# Altium PCB PCB_MEGO_Node_V1.3.1.PcbDoc
Units mil, origin at the board's own origin, x right, y up, seen from the top; angles counter-clockwise.
Board outline 1000 x 1900 mil, 2 copper layers (Top Layer, Bottom Layer); 52 components, 42 nets, 193 pads, 90 vias.
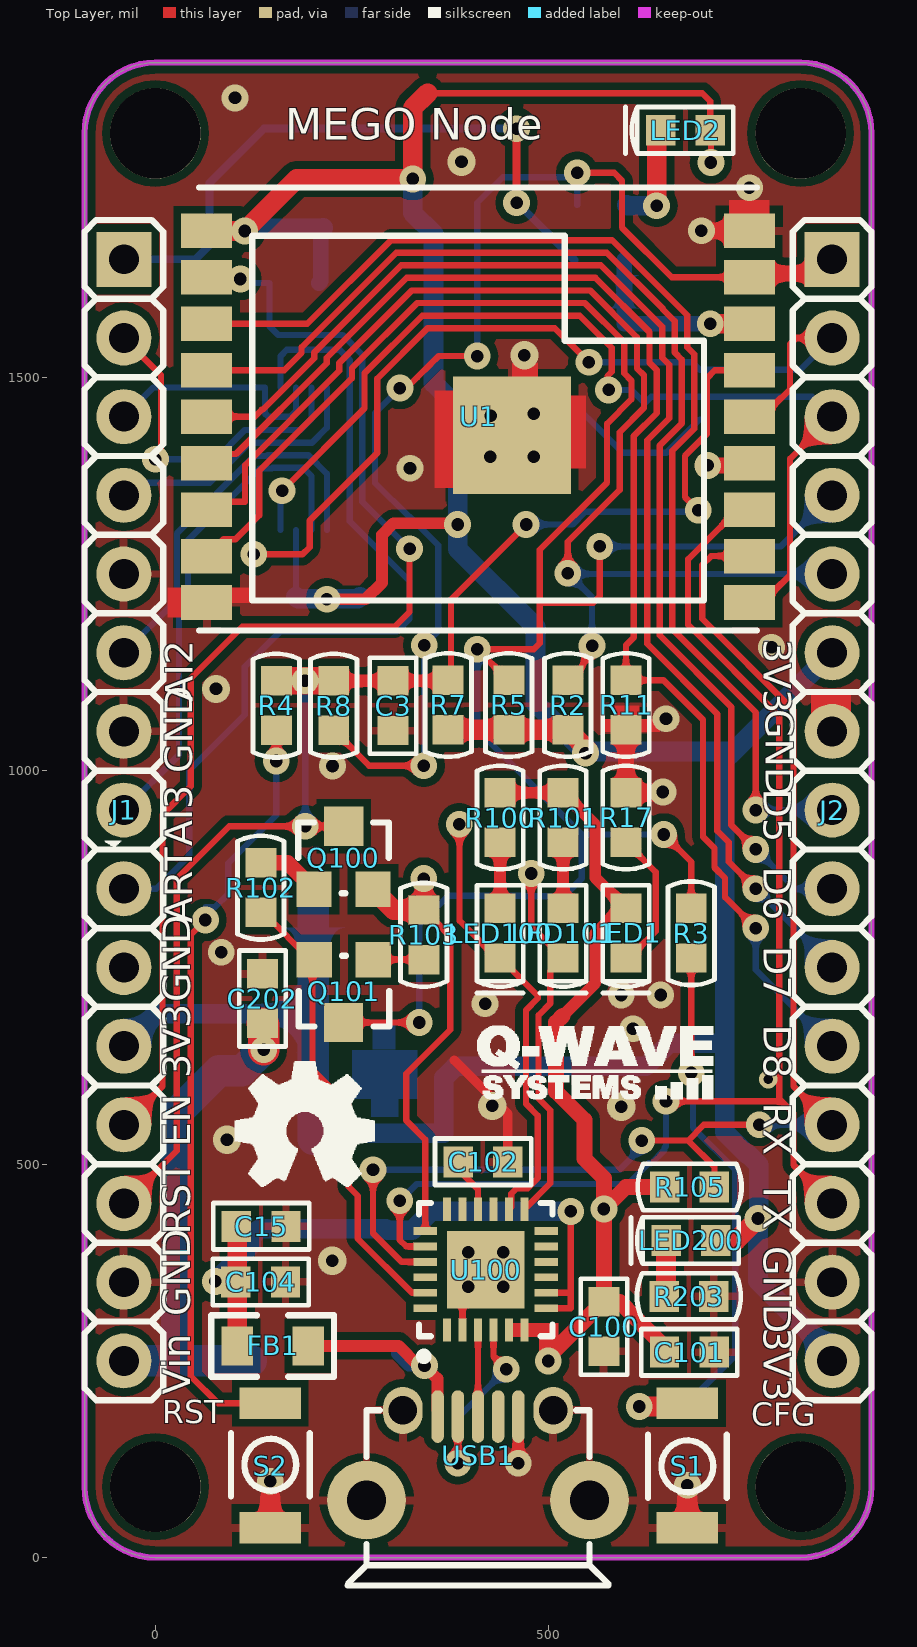
[diagram p0: Top Layer view]
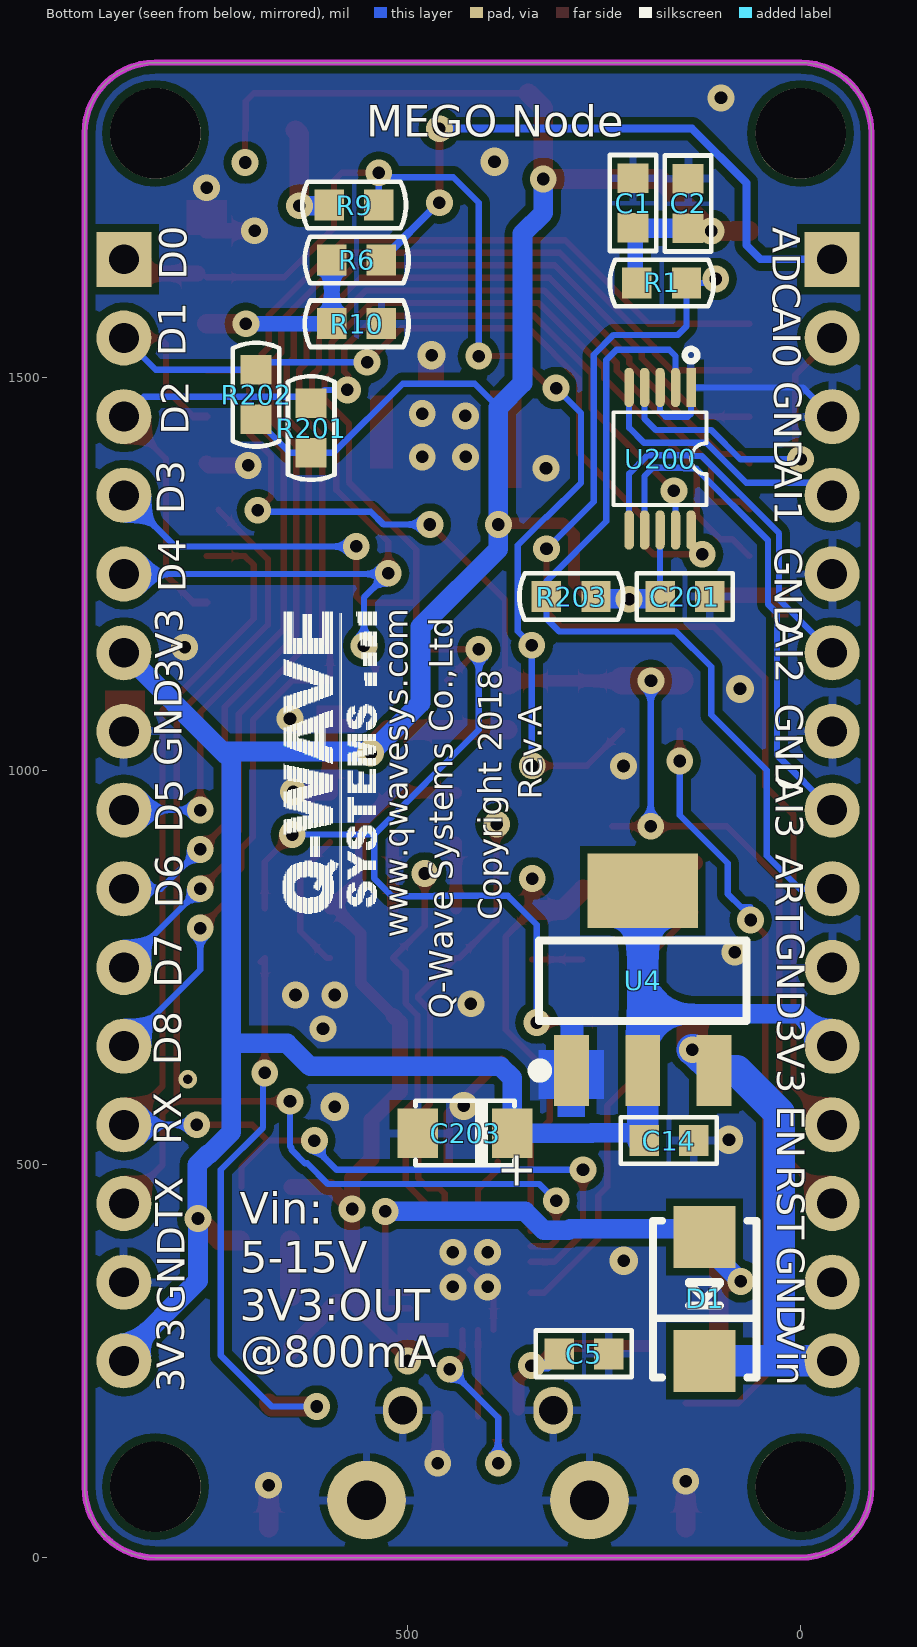
[diagram p1: Bottom Layer view, seen from below]

## Layer stack, top to bottom
Top Solder: solder mask 0.4, Solder Resist, Dk 3.5
Top Layer: signal copper 1.4
Dielectric 1: dielectric 12.6, FR-4, Dk 4.8
Bottom Layer: signal copper 1.4
Bottom Solder: solder mask 0.4, Solder Resist, Dk 3.5

## Board outline
-90,90 ccw(c0,90) 0,0 820,0 ccw(c820,90) 910,90 910,1810 ccw(c820,1810) 820,1900 0,1900 ccw(c0,1810) -90,1810

## Design rules (kind name [scope] priority, off if disabled: settings)
Clearance POLY1 [InPolygon] p1: gap=10 ignorepadtopadclearanceinfootprint=FALSE
Clearance [All] p2: gap=6 ignorepadtopadclearanceinfootprint=FALSE
ComponentClearance [All] p1 off: gap=10 collisioncheckmode=3 verticalgap=10 showdistances=FALSE
Height [All] p1 off: minheight=0 maxheight=1000 prefheight=500
HoleSize [All] p1 off: absolutevalues=TRUE maxlimit=100 minlimit=1 maxpercent=80.000 minpercent=20.000
HoleToHoleClearance [All] p1 off: gap=10 allowstackedmicrovias=TRUE
LayerPairs [All] p1 off: enforce=TRUE
MinimumSolderMaskSliver [All] p1 off: minsoldermaskwidth=10
NetAntennae [All] p1 off: netantennaetolerance=0
PolygonConnect poly [IsVia] p1: connectstyle=Direct reliefconductorwidth=10 reliefentries=4 polygonreliefangle="90 Angle" airgapwidth=10
PolygonConnect [All] p2: connectstyle=Relief reliefconductorwidth=10 reliefentries=4 polygonreliefangle="90 Angle" airgapwidth=10
RoutingVias [All] p1: holewidth=16 width=34 viastyle="Through Hole" minholewidth=16 minwidth=34 maxholewidth=16 maxwidth=34
SilkToSilkClearance [All] p1 off: silktosilkclearance=10
SilkToSolderMaskClearance [IsPad] p1 off: minsilkscreentomaskgap=10 clearancetoexposedcopper=TRUE
SolderMaskExpansion [All] p1: expansion=4
Width [All] p1: maxlimit=100 minlimit=8 preferedwidth=10 minimp=50.000000 maximp=50.000000 favimp=50.000000
21 further rules are at their usual default settings.

## Components (designator, comment, footprint, x,y, rotation, side; value= is the part's Value field where it differs from the comment)
C1 "104" IPC7351_EC_0603 213,1721.5 r270 bottom
C2 "105" IPC7351_EC_0603 143,1721 r270 bottom
C3 "104" IPC7351_EC_0603 302.08,1082.67 r90 top
C5 "103 (10nF)" IPC7351_EC_0603 275.5,259 r0 bottom
C14 "104" IPC7351_EC_0603 167.5,530 r180 bottom
C15 "4.7uF" IPC7351_EC_0603 134.5,421 r0 top
C100 "4.7uF" IPC7351_EC_0603 570,293.5 r270 top
C101 "104" IPC7351_EC_0603 678.5,261 r0 top
C102 "4.7uF" IPC7351_EC_0603 416.5,503 r0 top
C104 "104" IPC7351_EC_0603 133.81,350.39 r0 top
C201 "104" IPC7351_EC_0603 147.13,1221.3 r0 bottom
C202 "104" IPC7351_EC_0603 136,710.5 r270 top
C203 "10uF 6.3V" 3216_18 426.51,539.51 r0 bottom
D1 "SK1B" EDIS_SMA 122,328.74 r180 bottom
FB1 "Ferrite Beads" R0805 149,269 r0 top
J1 "THT_Male_P_1x15" HDR_1X15 -40,1650 r270 top locked
J2 "THT_Male_P_1x15" HDR_1X15 860,1650 r270 top
LED1 "BLUE" IPC7351_ELDS_0603 598.11,793.51 r270 top
LED2 "BLUE" IPC7351_ELDS_0603 673.5,1814 r180 top
LED100 "GREEN" IPC7351_ELDS_0603 438.11,793.51 r270 top
LED101 "RED" IPC7351_ELDS_0603 518.11,793.51 r270 top
LED200 "GREEN" IPC7351_ELDS_0603 680.5,403 r180 top
Q100 "BC847C" SOT-23-3 239.05,889.35 r0 top
Q101 "BC847C" SOT-23-3 239.61,720.02 r180 top
R1 "10K" IPC7351_ER_0603 176.5,1620 r0 bottom
R2 "10K" IPC7351_ER_0603 524.11,1083.5 r270 top
R3 "470R" IPC7351_ER_0603 681,793.5 r270 top
R4 "470R" IPC7351_ER_0603 153.68,1082.77 r90 top
R5 "10K" IPC7351_ER_0603 449.11,1083.5 r270 top
R6 "220K" IPC7351_ER_0603 564.22,1649.11 r0 bottom
R7 "10K" IPC7351_ER_0603 372.11,1083.5 r270 top
R8 "0R (NC) *Optional" IPC7351_ER_0603 226.68,1082.77 r90 top
R9 "2K" IPC7351_ER_0603 567.5,1719 r0 bottom
R10 "100K" IPC7351_ER_0603 564.22,1568.11 r0 bottom
R11 "4K7" IPC7351_ER_0603 598.11,1083.51 r270 top
R17 "2K" IPC7351_ER_0603 598.11,940.52 r270 top
R100 "2K" IPC7351_ER_0603 438.11,940.52 r90 top
R101 "2K" IPC7351_ER_0603 518.11,940.52 r90 top
R102 "12K" IPC7351_ER_0603 134,851.5 r270 top
R103 "12K" IPC7351_ER_0603 341.11,791.51 r90 top
R105 "4K7" IPC7351_ER_0603 679,471 r180 top
R201 "10K" IPC7351_ER_0603 622,1435.5 r270 bottom
R202 "10K" IPC7351_ER_0603 692,1478 r270 bottom
R203 "2K" IPC7351_ER_0603 678,332 r180 top
R203 "10K" IPC7351_ER_0603 291.51,1221.3 r180 bottom
S1 "CONFIG" SKRKAEE010 676,117 r270 top
S2 "RESET" SKRKAEE010 146,117 r90 top
U1 "ESP8266_WROOM_02" ESP-WROOM-02D 410,1450 r0 top locked
U4 "LD1117AS33TR" SOT-223-1 200.56,733.19 r180 bottom
U100 "CP2104" QFN24 419.84,365.98 r90 top
U200 "ADS1115" DGS-S-PDSO-G10 178.63,1396.55 r270 bottom
USB1 "microUSB" MICRO-USB-CON 410,130 r0 top locked

## Footprints (in the part's own frame and the unit in brackets; to place one, negate y for a bottom-side part, rotate by r counter-clockwise, add the part's x,y. Pads: shape width x height; smd on the part's side, far side on the other; paste and mask are expansions set on the pad)
3216_18 [mm]
  rect 1.3x1.6 smd: 1(-1.524,0) 2(1.524,0)
  silkscreen extent -1.6,-1.04 1.6,1.07, body extent -1.6,-0.8 1.6,0.8, height 1.68
DGS-S-PDSO-G10 [mm]
  rect 1.27x0.305 smd mask+0.051: 1(-2.3,1)
  oval 1.27x0.305 smd mask+0.051: 2(-2.3,0.5) 3(-2.3,0) 4(-2.3,-0.5) 5(-2.3,-1) 6(2.3,-1) 7(2.3,-0.5) 8(2.3,0) 9(2.3,0.5) 10(2.3,1)
  silkscreen extent -3.55,-1.5 1.5,1.5
EDIS_SMA [mm]
  rect 2x2 smd: 1(0,2) 2(0,-2)
  silkscreen extent -1.67,-2.53 1.67,2.52, body extent -1.4,-1.91 1.27,1.91, height 0.89
ESP-WROOM-02D [mil]
  rect 65x44 smd: 1(-344.92,236.22) 2(-344.92,177.17) 3(-344.92,118.11) 4(-344.92,59.06) 5(-344.92,0) 6(-344.92,-59.06) 7(-344.92,-118.11) 8(-344.92,-177.17) 9(-344.92,-236.22) 10(344.92,-236.22) 11(344.92,-177.17) 12(344.92,-118.11) 13(344.92,-59.06) 14(344.92,0) 15(344.92,59.06) 16(344.92,118.11) 17(344.92,177.17) 18(344.92,236.22)
  rect 149.61x149.61 smd: 19(43.31,-23.62)
  silkscreen extent -354,-272 354,291
HDR_1X15 [mil]
  rect 70x70 hole 38: 1(0,0)
  round 70 hole 38: 2(100,0) 3(200,0) 4(300,0) 5(400,0) 6(500,0) 7(600,0) 8(700,0) 9(800,0) 10(900,0) 11(1000,0) 12(1100,0) 13(1200,0) 14(1300,0) 15(1400,0)
  silkscreen extent -50,-50 1450,50, body extent -50,-49 1450,51, height 321
IPC7351_EC_0603 [mm] "Chip Capacitor; Body 1.6 x 0.8 mm (LxW typ) -- EIA 0603, Metric 1608"
  rect 0.95x1 smd: 1(-0.8,0) 2(0.8,0)
  silkscreen extent -1.55,-0.75 1.55,0.75
IPC7351_ELDS_0603 [mm] "SMT LED 0603"
  rect 0.95x1 smd: 1(-0.8,0) 2(0.8,0)
  silkscreen extent -1.55,-0.75 1.93,0.75
IPC7351_ER_0603 [mm] "Chip Capacitor; Body 1.6 x 0.8 mm (LxW typ) -- EIA 0603, Metric 1608"
  rect 0.95x1 smd: 1(-0.8,0) 2(0.8,0)
  silkscreen extent -1.67,-0.75 1.67,0.75
MICRO-USB-CON [mm]
  round 2.54 hole 1.27: 0(-3.6,-1.45) 0(3.6,-1.45)
  oval 1.27x1.524 hole 0.914: 0(-2.425,1.45) 0(2.425,1.45)
  oval 0.4x1.7 smd: 1(-1.3,1.25) 2(-0.65,1.25) 3(0,1.25) 4(0.65,1.25) 5(1.3,1.25)
  silkscreen extent -4.2,-4.2 4.2,1.45
QFN24 [mm] "QFN, 24-Leads, Body 4.00x4.00mm, Pitch 0.50mm, Thermal Pad 2.75x2.75mm, IPC Medium Density"
  rect 0.75x0.25 smd: 1(-1.95,1.25) 2(-1.95,0.75) 3(-1.95,0.25) 4(-1.95,-0.25) 5(-1.95,-0.75) 6(-1.95,-1.25) 13(1.95,-1.25) 14(1.95,-0.75) 15(1.95,-0.25) 16(1.95,0.25) 17(1.95,0.75) 18(1.95,1.25)
  rect 2.5x2.5 smd: 2(0,0)
  rect 0.25x0.75 smd: 7(-1.25,-1.95) 8(-0.75,-1.95) 9(-0.25,-1.95) 10(0.25,-1.95) 11(0.75,-1.95) 12(1.25,-1.95) 19(1.25,1.95) 20(0.75,1.95) 21(0.25,1.95) 22(-0.25,1.95) 23(-0.75,1.95) 24(-1.25,1.95)
  silkscreen extent -2.92,-2.15 2.15,2.15, body extent -2,-2 2,2, height 0.8
R0805 [mil]
  rect 40x50 smd: 1(-45,0) 2(45,0)
  silkscreen extent -78,-39 78,39, body extent -38,-25 41,24, height 21
SKRKAEE010 [mil]
  rect 40x78 smd: 1(-79,0) 2(79,0)
  silkscreen extent -39,-50 41,50, body extent -102,-59 102,59, height 90
SOT-23-3 [mil]
  rect 45x45 smd: 1(-37.5,-40) 2(37.5,-40)
  rect 50x50 smd: 3(0.5,40)
  silkscreen extent -58,-45 58,45, body extent -55,-50 55,46, height 43
SOT-223-1 [mil]
  rect 44x90 smd: 1(-90.55,-114.17) 2(0,-114.17) 3(90.55,-114.17)
  rect 140x94.49 smd: 4(0,114.17)
  silkscreen extent -139,-122 132,51, body extent -131,-145 133,139, height 73

## Part data
C1 C3 C14 C101 C104 C201 C202: library part "Cap Semi", "0.1µF ±5% 50V Ceramic Capacitor X7R 0603"
C2: library part "Cap Semi", "1µF ±5% 50V Ceramic Capacitor X7R 0603"
C5: library part "Cap Semi", "0.01µF ±5% 50V Ceramic Capacitor X7R 0603"
C15: library part Cap, "4.7µF ±10% 16V Ceramic Capacitor X5R 0805"
C100 C102: library part Cap, "4.7µF ±10% 16V Ceramic Capacitor X5R 0603"
C203: library part "Cap Pol1", "10µF 6.3V Tantalum Chip Capacitors ±20%"
D1: library part Diode, "SK1B SCHOTTKY BARRIER DIODE 100V/1A"
FB1: library part FB, "Ferrite Beads Chip Beads 600O for Signal Line"
J1 J2: "THT Male pin header strip 1x15"
LED1 LED2 LED101: library part LED2, "LED RED 0603"
LED100 LED200: library part LED2, "LED BLUE 0603"
Q100 Q101: library part NPN, "Bipolar (BJT) Transistor NPN 45V 100mA 100MHz 250mW Surface Mount TO-236AB (SOT23)"
R1 R2 R3 R4 R5 R7 R8 R9 R11 R17 R100 R101 R102 R103 R105 R201 R202 R203 R203: library part "Res Semi", "Resistor 0603"
R6 R10: library part "Res Semi", "Resistor 0603 1%"
S1 S2: library part SW-PB, "TACT SWITCH Size 6x6mm,2 Pins, SPST-NO"
U1: library part "ESP8266 WROOM 02", "WiFi Serial Transceiver Module (ESP8266) 4MB"
U4: library part LM1117MPX-3.3, "LD1117AS33TR Positive Fixed Voltage Regulator LDO 3.3V/1A"
U100: "USB Bridge, USB to UART USB 2.0 UART Interface 24QFN"
U200: "ADS1115 Analog to Digital Converters - ADC 16B ADC w/ Int MUX PGA Comp Osc & Ref"

## Free pads (board coordinates)
  round 115 hole 115 unplated paste-300 mask-300: 0(0,90) 0(0,1810) 0(820,90) 0(820,1810)

## Via types
v1: diameter 34, hole 16, Top Layer to Bottom Layer, tented both sides, 82 vias
v2: diameter 36, hole 16, Top Layer to Bottom Layer, tented both sides, 7 vias
v3: diameter 23.62, hole 11.81, Top Layer to Bottom Layer, tented both sides, 1 vias

## Nets (pads, with @x,y where several pads share a name; then routed paths per layer and width w, separated by ;. In a path a pad name is that pad's centre, name@x,y a point inside that pad or via, vN(x,y) a via of type N, cw(c..) or ccw(c..) an arc to the next point about the centre after c; other vN are vias at no path point)
3V3: C1.2 C2.2 C14.1 C201.2 C203.1 J1.11 J2.6 J2.15 LED2.1 LED200.1 R1.2 R2.2 R5.2 R7.2 R201.2 R202.2 R203.2@260.01,1221.3 U1.1 U4.2 U4.4 U200.8 | length 5336.4
  Top Layer w8: 346,1861 695,1861 704.99,1851.01 LED2.1 706,1812.99 v1(706,1773)
  Top Layer w15: v1(218,1218) 267,1218 288,1239 288,1300 302.5,1314.5 382.53,1314.5 v1(384.09,1312.94)
  Top Layer w25: U1.1 65.3,1686 v1(113.47,1686) 179.47,1752 v1(327,1752) 327,1842 346,1861 ; R7.2 R5.2 R2.2 v1@550.11,1026.01 ; LED200.1 737.87,403 v1(765.87,431)
  Bottom Layer w8: C201.2 U200.8 ; 384.09,1461.98 414.11,1492 505.71,1492 593.7,1404.01 R201.2 649.5,1404.01 R202.2
  Bottom Layer w20: R1.2 210,1622.01 C1.2@210,1689.5
  Bottom Layer w25: J1.11 1.36,691.36 164.41,691.36 ; C2.2 210,1689.5 212.5,1689.5 C1.2 ; C201.2 181.43,1218.5 257.21,1218.5 R203.2@260.01,1221.3 ; 198.56,691.36 164.41,691.36 ; C14.1 200.56,531.57 208.79,539.8 265.33,539.8 265.62,539.51 C203.1 366.51,609.51 381.36,624.36 623.36,624.36 652.5,653.5 723.5,653.5 ; 199.56,702.01 200.56,703.01 ; U4.2@200.56,655.21 164.41,691.36 ; 200.56,727.52 164.41,691.36 ; v1(327,1752) 327,1709 353.5,1682.5 353.5,1492.56 384.09,1461.98 v1(384.09,1312.94) 384.09,1281.9 482.99,1183 482.99,1086.03 v1@542.52,1026.5 ; v1(546.56,1022.46) 544.56,1024.46 734.46,1024.46 ; J2.15 860,257.68 765.87,351.82 v1(765.87,431) 767,432.13 767,499 753.5,512.5 751.88,512.5 723.5,540.88 723.5,653.5 ; J2.6 734.46,1024.46 ; 723.5,653.5 723.5,1013.5 734.46,1024.46
  Bottom Layer w40: C14.1@200.56,531.57 U4.2 200.56,655.21 200.56,703.01 200.56,727.52 U4.4@200.56,841.36
ADC: R6.2 R10.2 U1.16 | length 240.3
  Top Layer w10: U1.16@754.81,1568 U1.16
  Top Layer w25: v1(705,1568) U1.16@754.81,1568
  Bottom Layer w20: R6.2 R10.2 595.82,1568 v1(705,1568)
ADC_EX: J1.1 R6.1 | length 811.9
  Top Layer w10: v1(459,1722) v1(459,1816)
  Bottom Layer w10: J1.1 50.93,1650 68.85,1667.92 68.85,1746.85 138,1816 v1(459,1816) ; v1(459,1722) 459.83,1722 R6.1
AIN0: J1.2 U200.4 | length 435.9
  Top Layer w8: J1.2 7,1503 7,1403 v1(0,1396)
  Bottom Layer w8: v1(0,1396) 76.52,1396 113.52,1433 184.26,1433 198.32,1447.06 U200.4
AIN1: J1.4 U200.5 | length 344.7
  Bottom Layer w8: J1.4 -24,1366 69.15,1366 120.15,1417 199,1417 218,1436 U200.5
AIN2: J1.6 U200.6 | length 492.6
  Bottom Layer w8: J1.6 27.4,1217.4 27.4,1301.63 125.77,1400 141.36,1400 142.36,1401 194.63,1401 218,1377.63 U200.6
AIN3: J1.8 U200.7 | length 666.7
  Bottom Layer w8: J1.8@-40,972 J1.8 30,1020 30,1200.2 41.4,1211.6 41.4,1293 132.4,1384 147.99,1384 148.99,1385 188,1385 198.32,1374.69 U200.7
ALERT: J1.9 R203.1@323,1221.3 U200.2 | length 1101.5
  Bottom Layer w8: J1.9 1.01,850 43.01,891.99 43.01,1000.5 113.51,1071 113.51,1132 158.51,1177 307,1177 323,1193 323,1221.3 323,1240.98 247,1316.99 247,1522 234,1535 166.94,1535 158.94,1527 U200.2
CP_GPIO0: LED100.2 U100.14 | length 568.9
  Top Layer w8: v1(386.11,932.01) 386.56,931.56 386.56,809.36 433.91,762.02 LED100.2 486,714.13 486,710.79 471,695.79 471,576.76 486,561.76 486,482.33 473.19,469.52 459.16,469.52 452.13,462.49 452.13,445.52 U100.14
CP_GPIO1: LED101.2 U100.13 | length 476.2
  Top Layer w8: U100.13 502,475.7 502,568.38 487,583.38 487,689.16 502,704.16 502,745.9 LED101.2 477.56,802.57 v1(477.56,869.36)
DGND: C1.1 C2.1 C3.1 C5.1 C14.2 C15.2 C100.2 C101.2 C102.2 C104.2 C201.1 C202.1 C203.2 J1.3 J1.5 J1.7 J1.10 J1.14 J2.7 J2.14 R10.1 R11.2 R17.1 R203.1@709.5,332 S1.2 S2.1 U1.9 U1.13 U1.18 U1.19 U4.1 U100.2 U200.1 U200.3 USB1.0 USB1.5 | length 967.6
  Top Layer w8: U100.2@390.31,289.21 390.31,336.46 U100.2@419.84,365.98
  Top Layer w12: 380,632 448,564 C102.2
  Top Layer w15: v1(461.18,119.91) USB1.5
  Top Layer w20: R11.2 R17.1 643.97,972.02 v1(644.95,973) ; v1(693.89,1686.22) U1.18 ; v1@702.13,1390.94 702,1390.82 v1(702,1388) 751.98,1388 U1.13
  Top Layer w25: S2.1 146,78 ; S1.2 v1@676,78 ; J2.14@860,343.8 J2.14
  Bottom Layer w8: J1.3@-19.63,1429.63 J1.3 -2.9,1487.1 U200.1 139.26,1454 143.26,1450 171.63,1450 178.63,1457 U200.3
  other v1: 676.11,92.01 146.11,97.01 397.85,343.98 441.85,343.98 397.85,387.98 441.85,387.98 607,672 419,704 592,715 642,715 83.56,769.36 225.11,1006.01 648.95,1066 782.95,1157 323.56,1384.36 425.81,1398.88 480.81,1398.88 426,1451 480.81,1453.88 754.95,1741 101.17,1855.08
  other v2: 224.88,377.36 91,531 592,573 428,574 77,1104 469,1528 389,1774
DTR: Q101.2 R102.2 U100.23 | length 587.7
  Top Layer w8: R102.2 137.02,820.01 Q101.2@199.56,757.46 ; Q101.2@199.01,760.02 Q101.2@200.56,758.46 ; Q101.2 Q101.2@200.56,758.46 ; U100.23 326.1,336.46 257.11,405.44 257.11,459.67 245.56,471.22 245.56,574.56 199.56,620.56 Q101.2@199.56,757.46 ; Q101.2@199.56,757.46 Q101.2@200.56,758.46
EN: J1.12 R1.1 U1.2 | length 1478.8
  Top Layer w8: J1.12 9,599 9,944.36 45.11,980.48 45.11,1117.62 110.46,1182.97 303.97,1182.97 323,1202 v1(323,1282)
  Bottom Layer w8: v1(108,1625) 113,1620 R1.1 145,1565 156.25,1553.75 237.88,1553.75 263,1528.63 263,1342 v1@312,1293
GPIO0: J2.4 Q101.3 R3.1 R5.1 U1.8 | length 2776
  Top Layer w8: U1.8 86.55,1294.3 101.82,1294.3 132,1324.48 132,1381.09 249.78,1498.87 249.78,1511.63 332.51,1594.36 545.98,1594.36 596,1544.34 596,1505.01 605,1496.01 605,1471.99 574,1440.99 574,1366.34 488.56,1280.9 488.56,1216.44 ; Q101.3 v1(335.22,680.02) ; R5.1 448.32,1115 v1(408.95,1154.36) 481,1154.36 488.56,1161.92 488.56,1216.44 ; v1(564.66,1285.06) 564.66,1222 556.33,1213.66 491.34,1213.66 488.56,1216.44 ; v1(646.11,919.01) 681,884.12 R3.1
  Bottom Layer w8: v1(335.22,680.02) 335.22,804.22 372,841 464.91,841 465.55,840.36 519.28,840.36 541.92,863 541.92,919.01 ; v1(408.95,1154.36) 408.95,1051.97 541.92,919.01 ; v1(564.66,1285.06) 795.06,1285.06 J2.4 ; v1(646.11,919.01) 541.92,919.01
GPIO2: J2.5 R2.1 U1.7 | length 1544.7
  Top Layer w8: U1.7 75.19,1342 113.95,1342 113.95,1388.5 233.78,1508.32 233.78,1518.26 325.88,1610.36 552.61,1610.36 612,1550.97 612,1511.64 621,1502.64 621,1461.17 590,1430.17 590,1356.89 524.11,1291 v1(524.11,1251) ; R2.1@539.95,1128 v1(554.95,1158.83) v1@557.95,1165
  Bottom Layer w8: v1(524.11,1251) v1@525.11,1250 ; v1(554.95,1158.83) 554.95,1220.16 v1@525.11,1250 ; J2.5 v1@525.11,1250
GPIO4: J2.3 R201.1 U1.10 U200.9 | length 1237.8
  Top Layer w8: v1(161,1356) 265.78,1460.78 265.78,1505 339.14,1578.36 539.35,1578.36 580,1537.71 580,1506.99 574.79,1501.77 574.79,1485.21 v1(576,1484) ; U1.10@771.58,1213.78 806.61,1248.81 806.61,1396.61 J2.3
  Top Layer w10: U1.10 U1.10@771.58,1213.78
  Bottom Layer w8: U200.9 v1@158.94,1339.14 ; v1(576,1484) 605,1484 R201.1 630.2,1475.2 834.8,1475.2 J2.3
GPIO5: J2.2 R202.1 U1.14 U200.10 | length 1162.3
  Top Layer w8: v1(125,1275) 187,1275 196,1284 196,1318 281.78,1403.78 281.78,1498.37 345.76,1562.36 507.64,1562.36 v1(551,1519) ; U1.14@771.58,1450 806.61,1485.03 806.61,1542.46 814.16,1550 J2.2
  Top Layer w10: U1.14 U1.14@771.58,1450
  Bottom Layer w8: v1@557,1513 v1(551,1519) 682.5,1519 R202.1 819.5,1509.5 J2.2 J2.2@856,1554
GPIO12: J2.9 U1.4 | length 1552.6
  Top Layer w8: U1.4 163.8,1509.06 185.78,1531.04 185.78,1538.14 306,1658.36 573.77,1658.36 645.05,1587.09 644.71,1586.75 660,1571.46 660,1531.52 669,1522.52 669,1441.29 641,1413.29 641,1172.05 732,1081.05 732,931 v1(763,900)
  Bottom Layer w8: v1(763,900) 813,850 J2.9
GPIO13: J2.10 U1.5 | length 1622.1
  Top Layer w8: U1.5 125.95,1450 134.95,1459 136.37,1459 201.78,1524.41 201.78,1531.51 312.63,1642.36 565.86,1642.36 644,1564.22 644,1524.89 653,1515.89 653,1447.92 624.92,1419.84 624.92,1161.26 714,1072.18 714,923.54 728.55,908.99 728.55,884.45 v1(763,850)
  Bottom Layer w8: v1(763,850) 860,753 J2.10
GPIO14: J2.8 U1.3 | length 1492
  Top Layer w8: U1.3 193.12,1568.11 299.37,1674.36 580.4,1674.36 676,1578.76 676,1538.15 685,1529.15 685,1434.66 657,1406.66 657,1180.09 763,1074.09 v1(763,950)
  Bottom Layer w8: v1@750.56,950 v1(763,950) J2.8
GPIO15: J2.11 R11.1 U1.6 | length 1756.9
  Top Layer w8: U1.6 76.64,1402.5 102.5,1402.5 217.78,1517.78 217.78,1524.88 319.25,1626.36 559.23,1626.36 628,1557.6 628,1518.27 637,1509.27 637,1454.55 607.92,1425.47 607.92,1169.36 598.11,1159.55 R11.1 645.71,1115.01 696,1064.72 696,916.09 710.55,901.54 710.55,876.99 723.99,863.55 723.99,839.01 v1(763,800)
  Bottom Layer w8: v1(763,800) 763,747 J2.11
GPIO16: J2.1 R8.1 R9.1 U1.17 | length 1582.8
  Top Layer w8: R8.1 271.59,1006.36 v1(341.19,1006.36) ; v1@314.94,1482.19 332.75,1500 333.01,1500 350,1516.99 350,1517.25 359.75,1527 v1(409,1527) ; v1(536,1760) 583,1760 593,1750 593,1690.28 656.11,1627.17 U1.17 ; J2.1@837.17,1627.17 842,1632 J2.1
  Top Layer w20: U1.17@766.24,1632 842,1632 J2.1@848.49,1632
  Bottom Layer w8: v1(310.78,1486.36) 279,1454.59 279,1366 323,1322 324.01,1322 359.59,1286.43 359.59,1177.39 v1(341.56,1159.36) 341.56,1006.73 v1(341.19,1006.36) ; v1(409,1527) 409,1722 441.35,1754.35 530.35,1754.35 v1(536,1760) R9.1
NetC5_2: C5.2 FB1.2 USB1.1 | length 270.6
  Top Layer w15: FB1.2 309,269 334,244 v1(342,244) 358.41,227.59 USB1.1@358.41,188
  Bottom Layer w15: C5.2 322,244 v1(342,244) 342,251.5 v1@341.5,252
NetLED1_2: LED1.2 R17.2 | length 180.6
  Top Layer w8: LED1.2 601.99,762.02 635.92,795.94 635.92,871.22 R17.2
NetLED2_2: LED2.2 R9.2 | length 136.5
  Top Layer w25: v1(637,1718) 637,1809 LED2.2
  Bottom Layer w25: R9.2 599.99,1718 v1(637,1718)
NetLED100_1: LED100.1 R100.1 | length 84
  Top Layer w15: LED100.1 R100.1
NetLED101_1: LED101.1 R101.1 | length 84
  Top Layer w15: LED101.1 R101.1
NetLED200_2: LED200.2 R203.2@646.5,332 | length 72
  Top Layer w25: R203.2@646.5,332 649,334.5 LED200.2
NetQ100_1: Q100.1 R102.1 | length 81.5
  Top Layer w20: R102.1 167.9,883 Q100.1
NetQ101_1: Q101.1 R103.1 | length 64
  Top Layer w8: Q101.1 R103.1
NetR3_2: R3.2 S1.1 | length 748.2
  Top Layer w8: v1@681,614.53 v1(681,616) R3.2 R3.2@686,757
  Top Layer w25: v1(615,192) 672,192 S1.1
  Bottom Layer w8: v1(615,192) 672,192 736.87,256.87 736.87,492.86 683.13,546.6 683.13,613.87 v1(681,616)
NetR4_1: R4.1 S2.2 | length 992.2
  Top Layer w8: v1(63.56,810.36) 45,791.8 45,230.56 79.56,196 S2.2 ; v1@153.68,1008.16 R4.1
  Bottom Layer w8: v1(63.56,810.36) 63.56,826.36 75.57,826.36 92.56,843.35 92.56,882.36 153.56,943.36 v1(153.56,1012.36)
RST: C3.2 J1.13 Q100.3 R4.2 R7.1 R8.2 U1.15 | length 1802.6
  Top Layer w8: J1.13 27,517 27,862.64 93.71,929.35 v1(190.56,929.35) Q100.3 ; R7.1 375.69,1118.58 375.69,1217.52 v1(471.11,1312.94) ; v1(689.92,1330.94) 673,1347.87 673,1400.04 701,1428.04 701,1499.06 711,1509.06 U1.15
  Top Layer w15: R8.2 R7.1@371.38,1114.27
  Top Layer w35: R4.2 v1(190.18,1114.27) R8.2 ; R7.1@371.38,1114.27 R7.1
  Bottom Layer w8: v1(190.18,1114.27) 190.56,1113.88 v1(190.56,929.35) ; v1@462.92,1312.94 v1(471.11,1312.94) 530.11,1312.94 546.17,1329 687.98,1329 v1(689.92,1330.94)
RTS: Q100.2 R103.2 U100.19 | length 570.5
  Top Layer w8: R103.2 374.8,789.32 374.8,671 318.76,614.96 318.76,555.56 343.07,531.25 U100.19
  Top Layer w20: R103.2 v1(341.11,862.96)
  Top Layer w25: Q100.2 302.89,823.01 R103.2
RXD: J2.12 R105.1 U1.11 U100.21 | length 1686.8
  Top Layer w8: v1(276.56,492.86) 276.56,412.06 312.79,375.83 U100.21 ; v1@626.95,530 677,530 ; R105.1 710.5,496.5 677,530 ; U1.11 706.27,1272.83 695,1261.57 695,1193 811,1077 811,599 J2.12 ; v1(767.41,550) 697,550 677,530
  Bottom Layer w8: v1(276.56,492.86) 589.82,492.86 v1@626.95,530 ; v1(767.41,550) J2.12
  other v1: 617.95,530
TXD: J2.13 U1.12 U100.20 | length 1642.5
  Top Layer w8: v1(310.56,453.36) 310.56,403.51 318.56,395.51 U100.20 ; v1(648.95,580) 796,580 ; U1.12@739.92,1331.94 677,1269.02 677,1185.54 793,1069.54 793,583 796,580 ; J2.13 811,499 811,565 796,580
  Bottom Layer w8: v1(310.56,453.36) 332.06,474.86 600.85,474.86 626.99,501 629.97,501 646.95,517.99 646.95,520.97 648.95,522.97 v1(648.95,580)
  other v3: 779,608
USB_DN: U100.4 USB1.2 | length 260.9
  Top Layer w8: v1(384.41,119.91) USB1.2 ; U100.4 429.68,255.82 v1(446,239.5)
  Bottom Layer w8: v1(384.41,119.91) 384.41,177.91 v1(446,239.5)
USB_DP: U100.3 USB1.3 | length 110
  Top Layer w8: USB1.3 U100.3
VDD5V: C202.2 D1.2 J1.15 U4.3 | length 656.8
  Top Layer w40: C202.2 137.56,677.45 v1(137.56,645.36)
  Bottom Layer w40: J1.15 30.73,250 ; D1.2 30.73,250 ; v1(137.56,645.36) 136.36,645.36 U4.3 81.02,619.02 26.88,564.88 26.88,253.84 30.73,250
VDDUSB: C15.1 C104.1 D1.1 FB1.1 U100.7 U100.8 | length 868.2
  Top Layer w8: U100.7 528,316.77 528,336.46 ; U100.8 528,336.46 ; v1(528,440) 528,336.46
  Top Layer w25: v1(76,351) 76.61,350.39 C104.1 ; C15.1@103.01,427.4 C15.1 104,420.01 FB1.1
  Bottom Layer w25: v1(76,351) 122,397 D1.1 132.52,418 292.89,418 295.03,415.86 326.1,415.86 350.23,440 v1(528,440)
VIO: C100.1 C101.1 LED1.1 R100.2 R101.2 R105.2 U100.5 U100.6 | length 1131
  Top Layer w15: R100.2@437.96,971.86 R100.2 R101.2 518.26,972.02 559.11,931.16 559.11,864.01 LED1.1 591.11,825.01 559.11,793.01 559.11,730.16 517.74,688.79
  Top Layer w20: v1(499.41,249.91) 499.41,255.25 569.15,324.99 C100.1 ; 517.74,688.79 509,680.05 509,592.5 545.25,556.25 545.25,506.75 570,482 v1(570,443) ; C101.1 647.01,267.99 620.69,294.31 620.35,294.31 609.8,304.86 609.8,305.2 590.01,324.99 C100.1 ; R105.2 598,471 v1(570,443) ; C100.1 v1(570,443)
  Bottom Layer w20: v1(499.41,249.91) v1@501.2,251.7
VPP: C102.1 U100.16 | length 70.6
  Top Layer w8: C102.1 385.01,492.99 410,468 U100.16
pads on no net: U100.1 U100.9 U100.10 U100.11 U100.12 U100.15 U100.17 U100.18 U100.22 U100.24 USB1.4

## Polygon pours and split planes (outlines as drawn)
DGND on Bottom Layer "DGND_L02_P002" (solid, remove dead copper, pour order 2): 910,90 910,83.11 cw(c834.89,83.11) 888,30 884.87,26.87 cw(c820,91.74) 820,0 0,0 cw(c0,89.33) -63.16,26.16 -70,33 cw(c-21.72,81.28) -90,81.28 -90,1810 cw(c-0.67,1810) -63.84,1873.16 -61,1876 cw(c-3.06,1818.06) -3.06,1900 820,1900 cw(c820,1810.67) 883.16,1873.84 886,1871 cw(c828.06,1813.06) 910,1813.06 910,88.41 ccw(c913.41,88.41) 911,86
DGND on Top Layer "DGND_L01_P004" (solid, remove dead copper, pour order 4): 910,90 910,83.11 cw(c834.89,83.11) 888,30 884.87,26.87 cw(c820,91.74) 820,0 0,0 cw(c0,89.33) -63.16,26.16 -70,33 cw(c-21.72,81.28) -90,81.28 -90,1810 cw(c-0.67,1810) -63.84,1873.16 -61,1876 cw(c-3.06,1818.06) -3.06,1900 820,1900 cw(c820,1810.67) 883.16,1873.84 886,1871 cw(c828.06,1813.06) 910,1813.06 910,88.41 ccw(c913.41,88.41) 911,86

## Keep-outs
Keep-Out Layer:
  lines w8: 680,1900 820,1900 ; 820,1900 cw(c820,1810) 910,1810 910,90 cw(c820,90) 820,0 0,0 cw(c0,90) -90,90 -90,1810 cw(c0,1810) 0,1900 820,1900

## Other copper
Top Layer:
  rectangle net VIO: 447.61,280.46 512.41,298.46
  rectangle net VIO: 487.41,244.91 512.41,298.46
  rectangle net DGND: 832.95,1049 883.95,1102
  rectangle net DGND: 15.11,1213.01 120.11,1233.01
  rectangle net DGND: 15.11,1195.01 37.11,1213.01
  rectangle net DGND: 582.11,1059.01 615.11,1083.01
  rectangle net DGND: 567.11,1049.01 641.11,1066.01
  rectangle net DGND: 453.11,1490.01 486.11,1519.01
  rectangle net DGND: 359.11,1393.01 396.11,1465.01
  rectangle net DGND: 518.11,1384.01 547.11,1477.01
  rectangle net DGND: 354.56,1359.36 394.56,1483.36
  rectangle net DGND: 729.17,1681.08 780.17,1725.08
Bottom Layer:
  rectangle net DGND: 250.11,583.01 333.11,645.01
  rectangle net DGND: 276.11,646.01 305.11,683.01
  rectangle net DGND: 274.11,560.01 309.11,584.01

## Silkscreen, mask and mechanical layers (free items; w line width, h text height)
Top Overlay:
  drawing of 1134 lines, arcs and shapes, not listed
  text "MEGO Node" at 165,1802 h40
  text "3V3" at 762,1167 h60 r270
  text "AI2" at 59,1088 h60 r90
  text "GND" at 764,1078 h60 r270
  text "GND" at 58,997 h60 r90
  text "D5" at 762,977 h60 r270
  text "AI3" at 58,904 h60 r90
  text "D6" at 762,877.88 h60 r270
  text "ART" at 58,806 h60 r90
  text "D7" at 762,776.77 h60 r270
  text "GND" at 56,706 h60 r90
  text "D8" at 762,676.89 h60 r270
  text "3V3" at 56,609 h60 r90
  text "RX" at 762,577.94 h60 r270
  text "EN" at 56,522 h60 r90
  text "TX" at 762,479 h60 r270
  text "RST" at 56,410 h60 r90
  text "GND" at 762,395.8 h60 r270
  text "GND" at 56,307 h60 r90
  text "3V3" at 762,292 h60 r270
  text "Vin" at 56,207 h60 r90
  text "RST" at 9,161 h50
  text "CFG" at 757,158 h50
Bottom Overlay:
  drawing of 733 lines, arcs and shapes, not listed
  text "MEGO Node" at 552,1806 h40
  text "ADC" at 47,1691 h60 r90
  text "D0" at 769,1624 h60 r270
  text "AI0" at 46,1590 h60 r90
  text "D1" at 770,1527 h60 r270
  text "GND" at 45,1495 h60 r90
  text "D2" at 766,1427 h60 r270
  text "AI1" at 44,1390 h60 r90
  text "D3" at 772,1326 h60 r270
  text "GND" at 44,1284 h60 r90
  text "D4" at 770,1227 h60 r270
  text "AI2" at 43,1189 h60 r90
  text "3V3" at 774,1112 h60 r270
  text "GND" at 43,1085 h60 r90
  text "GND" at 775,1006 h60 r270
  text "AI3" at 43,992 h60 r90
  text "Rev.A" at 329,963 h30 r270
  text "D5" at 774,921 h60 r270
  text "ART" at 43,894 h60 r90
  text "D6" at 774,825 h60 r270
  text "Copyright 2018" at 380,810 h30 r270
  text "GND" at 41,794 h60 r90
  text "www.qwavesys.com" at 499,788 h30 r270
  text "D7" at 775,724 h60 r270
  text "Q-Wave Systems Co.,Ltd" at 442,685 h30 r270
  text "3V3" at 41,684 h60 r90
  text "D8" at 776,626 h60 r270
  text "EN" at 41,574 h60 r90
  text "RX" at 776,525 h60 r270
  text "RST" at 41,498 h60 r90
  text "Vin:" at 713,424 h40
  text "TX" at 774,421 h60 r270
  text "GND" at 41,395 h60 r90
  text "5-15V" at 712,362 h40
  text "GND" at 771,310 h60 r270
  text "3V3:OUT" at 713,301 h40
  text "Vin" at 41,295 h60 r90
  text "@800mA" at 712,242 h40
  text "3V3" at 772,210 h60 r270

## Text inside footprints (layer, text, board x,y; h text height)
C203: Bottom Overlay "+" at 334.51,510.51 h45 r180